# Altium PCB pcb.PcbDoc
Units mm, origin at the board's own origin, x right, y up, seen from the top; angles counter-clockwise.
Board outline 50 x 31 mm, 2 copper layers (Top Layer, Bottom Layer); 17 components, 25 nets, 104 pads, 41 vias.
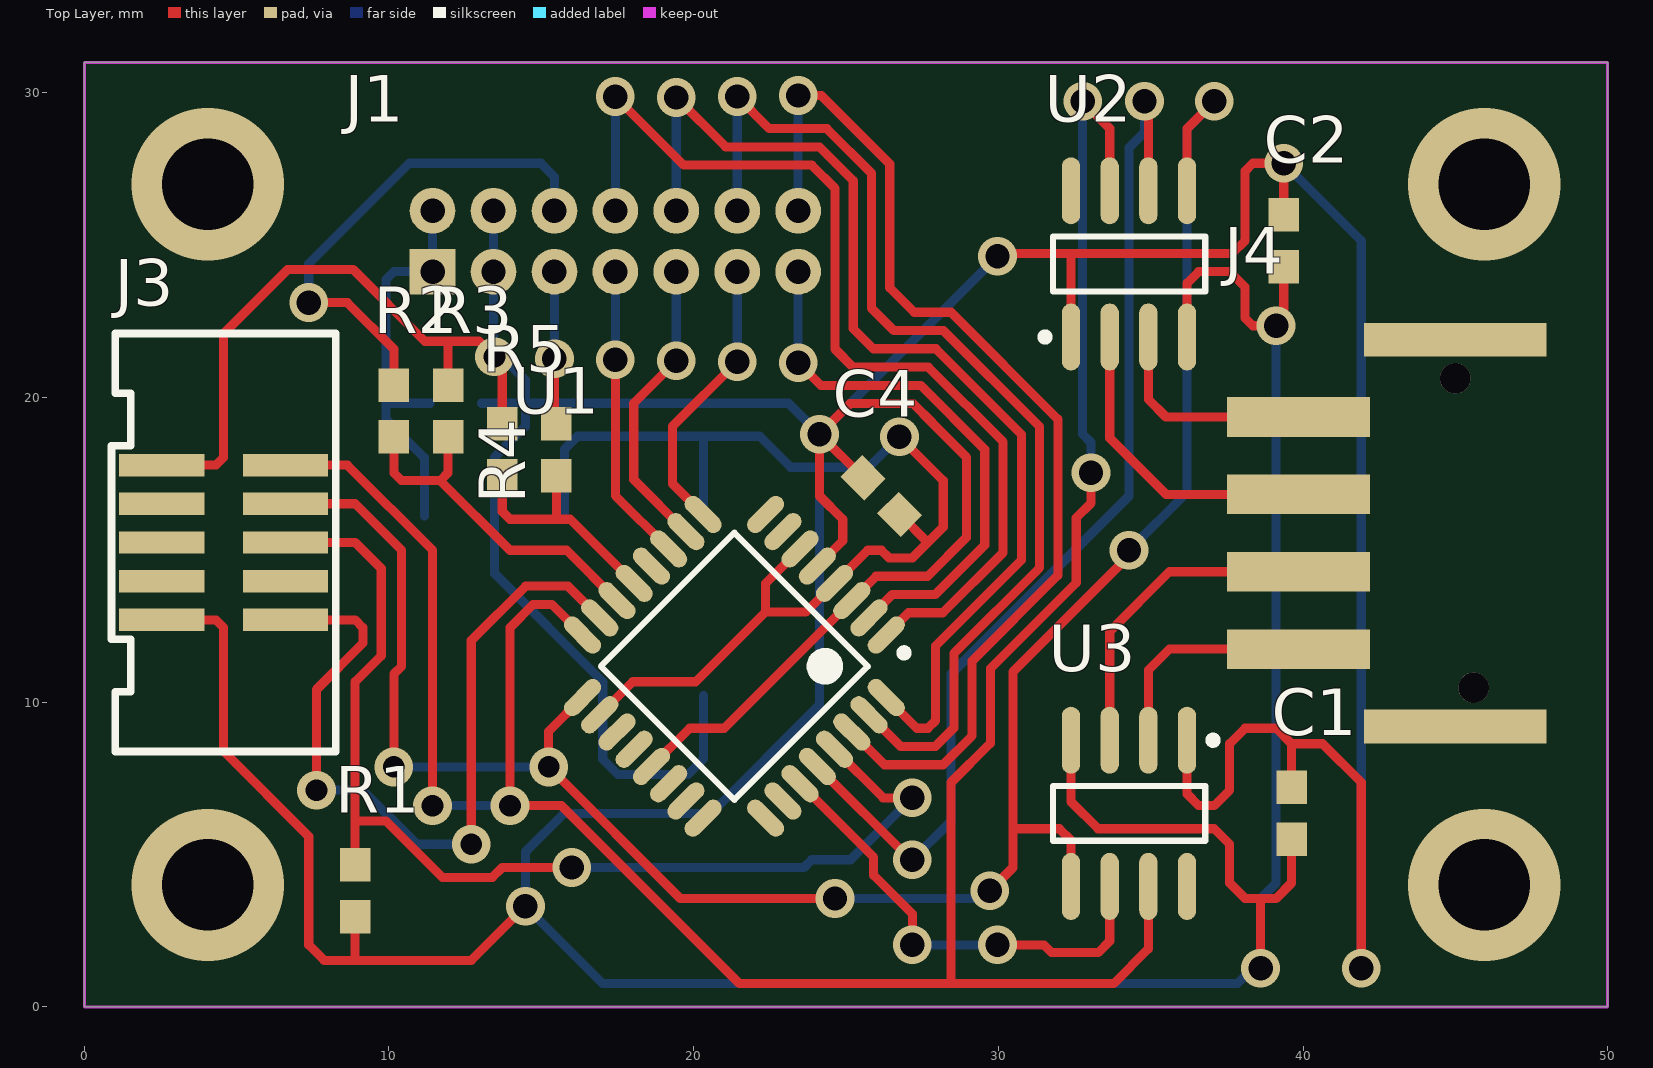
[diagram p0: Top Layer view]
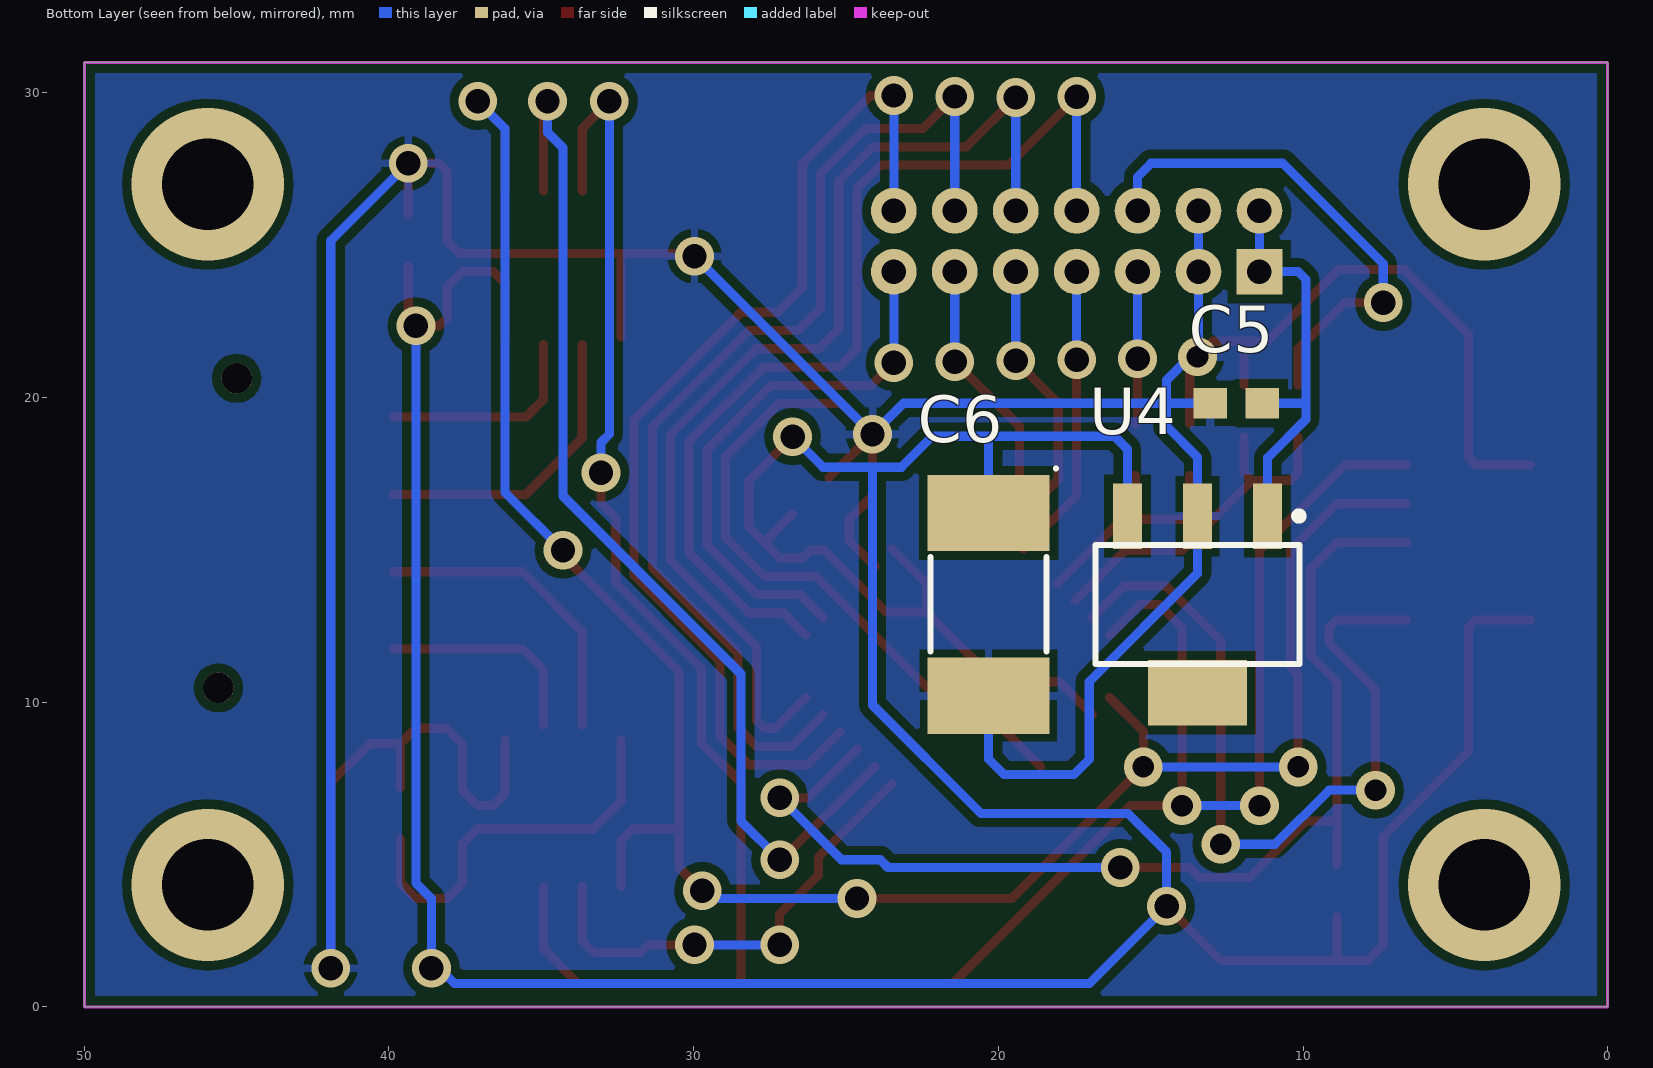
[diagram p1: Bottom Layer view, seen from below]
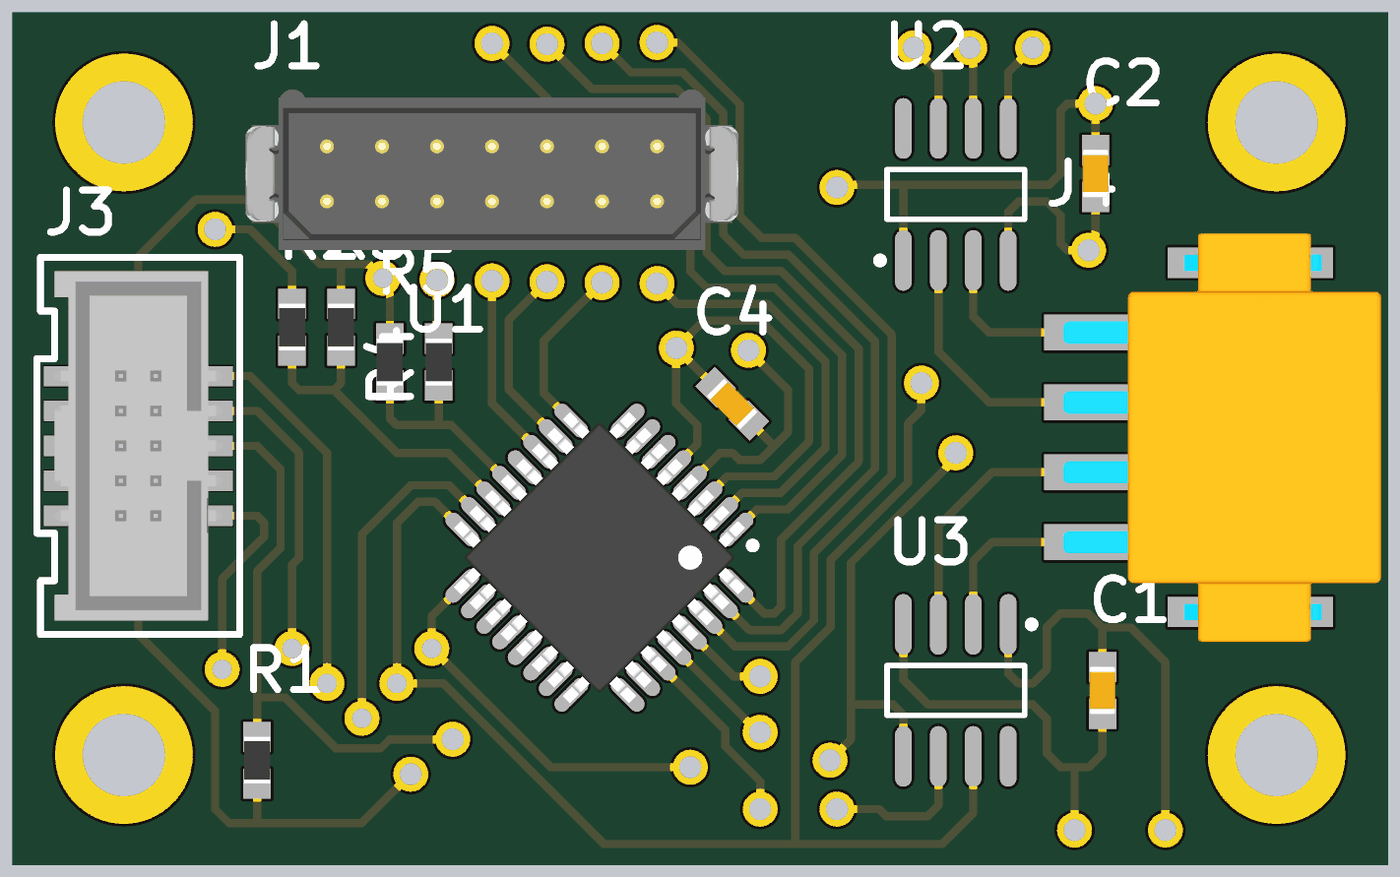
[diagram p2: 3D render of the assembled board from above, using the file's embedded part models]
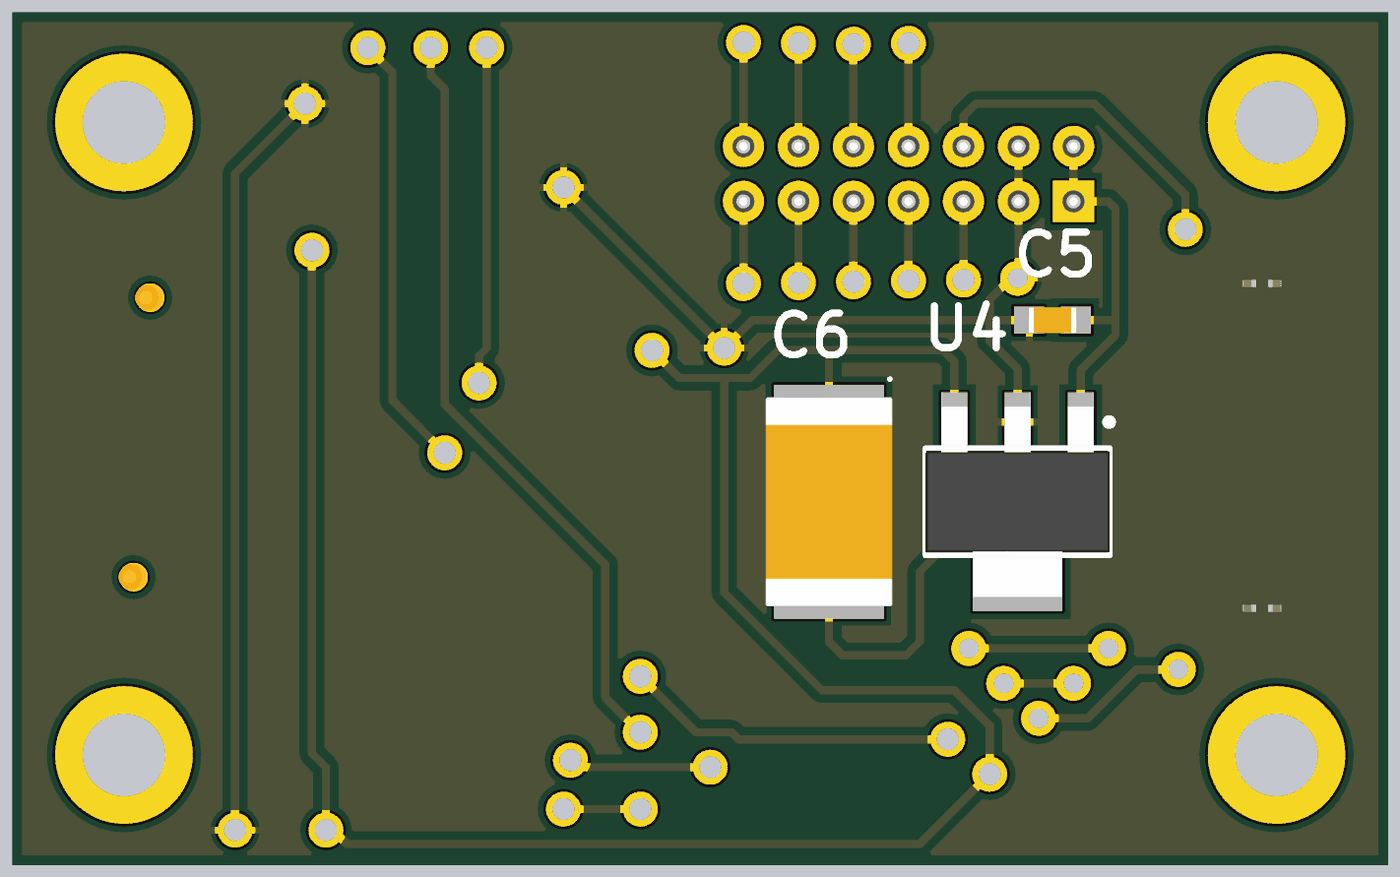
[diagram p3: 3D render of the assembled board from below, using the file's embedded part models]

## Layer stack, top to bottom
Top Solder: solder mask 0.0102, Solder Resist, Dk 3.5
Top Layer: signal copper 0.0356
Dielectric 1: dielectric 0.32, FR-4, Dk 4.8
Bottom Layer: signal copper 0.0356
Bottom Solder: solder mask 0.0102, Solder Resist, Dk 3.5

## Board outline
0,0 50,0 50,31 0,31

## Design rules (kind name [scope] priority, off if disabled: settings)
Clearance Clearance_MCU [InComponent('U1') vs InComponent('U1')] p1: gap=0.2
Clearance [All] p2: gap=0.3
HoleSize [All] p1: absolutevalues=TRUE maxlimit=3 minlimit=0.025 maxpercent=80.000 minpercent=20.000
MinimumSolderMaskSliver [All] p1 off: minsoldermaskwidth=0.254
PolygonConnect [All] p1: connectstyle=Relief reliefconductorwidth=0.254 reliefentries=4 polygonreliefangle="90 Angle" airgapwidth=0.254
RoutingVias [All] p1: holewidth=0.8 width=1.27 viastyle="Through Hole" minholewidth=0.8 minwidth=1.27 maxholewidth=0.8 maxwidth=1.27
SilkToSilkClearance [All] p1 off: silktosilkclearance=0.254
SilkToSolderMaskClearance [IsPad] p1 off: minsilkscreentomaskgap=0.254 clearancetoexposedcopper=TRUE
SolderMaskExpansion [All] p1: expansion=0.102
Width [All] p1: maxlimit=0.5 minlimit=0.3 preferedwidth=0.3
26 further rules are at their usual default settings.

## Classes and differential pairs
net class D[7..0]: D0 D1 D2 D3 D4 D5 D6 D7

## Components (designator, comment, footprint, x,y, rotation, side; value= is the part's Value field where it differs from the comment)
C1 "100n" cap_0603_standard 39.624,6.35 r270 top
C2 "100n" cap_0603_standard 39.37,25.146 r270 top
C4 "100n" cap_0603_standard 26.162,16.764 r315 top
C5 "0.47u" cap_0603_standard 12.192,19.812 r180 bottom
C6 "100u" cap_tantalum_eia_size_7343-31 20.32,13.208 r270 bottom
J1 "To radio ctrlr" con_datamate_2row_14pin 11.43,24.13 r0 top
J3 "ISP" SHF-105-01-X-D-SM 4.572,15.24 r90 top
J4 "Thermocouple terminal block" con_harting_spring_cage_4way 44.25,15.55 r270 top
R1 "10k" res_0603_standard 8.89,3.81 r90 top
R2 "10k" res_0603_standard 10.16,19.558 r270 top
R3 "10k" res_0603_standard 11.938,19.558 r90 top
R4 "10k" res_0603_standard 15.494,18.288 r270 top
R5 "10k" res_0603_standard 13.716,18.288 r90 top
U1 "ATmega328P" ic_atmel_atmega328p 21.336,11.176 r225 top
U2 "MAX31855 Thermocouple interface" SO8_N 34.29,24.384 r90 top
U3 "MAX31855 Thermocouple interface" SO8_N 34.29,6.35 r270 top
U4 "V_reg" ic_lin_reg_lm3940_sot223 13.462,13.208 r270 bottom

## Footprints (in the part's own frame and the unit in brackets; to place one, negate y for a bottom-side part, rotate by r counter-clockwise, add the part's x,y. Pads: shape width x height; smd on the part's side, far side on the other; paste and mask are expansions set on the pad)
cap_0603_standard [mm] "Generic 0603 chip capacitor (IPC-SM-782)"
  rect 1.1x1 smd: 1(-0.85,0) 2(0.85,0)
  body extent -0.87,-0.48 0.87,0.48, height 0.85
cap_tantalum_eia_size_7343-31 [mm] "Generic tantalum capacitor, EIA size code 7343-31"
  rect 2.5x4 smd: 1(-3,0) 2(3,0)
  silkscreen extent -4.51,-1.9 1.55,2.26, body extent -3.8,-2.3 3.8,2.3, height 3.1
con_datamate_2row_14pin [mm] "Datamate 14pin pcb-to-wire connector"
  rect 1.5x1.5 hole 0.8 mask+0.1: 1(0,0)
  round 1.5 hole 0.8 mask+0.1: 2(0,2) 3(2,0) 4(2,2) 5(4,0) 6(4,2) 7(6,0) 8(6,2) 9(8,0) 10(8,2) 11(10,0) 12(10,2) 13(12,0) 14(12,2)
  body extent -2.95,-1.77 14.95,4.08, height 8.05
con_harting_spring_cage_4way [mm] "Harting part no  14 01 041 3102 000"
  rect 1.1x6 smd: 0(-6.35,0.75) 0(6.35,0.75)
  round 1 hole 1: 0(-5.08,0.75) 0(5.08,1.35)
  rect 1.3x4.7 smd: 1(3.81,-4.4) 2(1.27,-4.4) 3(-1.27,-4.4) 4(-3.81,-4.4)
  body extent -7.43,-6.05 7.43,5.5, height 5
ic_atmel_atmega328p [mm] "TQFP, 32-Leads, Body 7,00x7,00mm, Pitch 0,80mm, IPC Medium Density"
  oval 1.5x0.55 smd: 1(-4.25,2.8) 2(-4.25,2) 3(-4.25,1.2) 4(-4.25,0.4) 5(-4.25,-0.4) 6(-4.25,-1.2) 7(-4.25,-2) 8(-4.25,-2.8) 17(4.25,-2.8) 18(4.25,-2) 19(4.25,-1.2) 20(4.25,-0.4) 21(4.25,0.4) 22(4.25,1.2) 23(4.25,2) 24(4.25,2.8)
  oval 0.55x1.5 smd: 9(-2.8,-4.25) 10(-2,-4.25) 11(-1.2,-4.25) 12(-0.4,-4.25) 13(0.4,-4.25) 14(1.2,-4.25) 15(2,-4.25) 16(2.8,-4.25) 25(2.8,4.25) 26(2,4.25) 27(1.2,4.25) 28(0.4,4.25) 29(-0.4,4.25) 30(-1.2,4.25) 31(-2,4.25) 32(-2.8,4.25)
  silkscreen extent -4.37,-3.1 3.1,3.75, body extent -4.5,-4.5 4.5,4.5, height 1.2
ic_lin_reg_lm3940_sot223 [mm] "LM3940 linear voltage regulator, SOT223"
  rect 2.15x0.95 smd: 1(-2.9,2.3) 2(-2.9,0) 3(-2.9,-2.3)
  rect 2.15x3.25 smd: 4(2.9,0)
  silkscreen extent -3.02,-3.35 1.95,3.45, body extent -3.46,-3.35 3.46,3.35, height 1.8
res_0603_standard [mm] "Generic 0603 chip resistor (IPC-SM-782)"
  rect 1.1x1 smd: 1(-0.85,0) 2(0.85,0)
  body extent -0.85,-0.48 0.85,0.48, height 0.6
SHF-105-01-X-D-SM [mil]
  rect 29x110 smd mask+2: 1(-100,-80) 2(-100,80) 3(-50,-80) 4(-50,80) 5(0,-80) 6(0,80) 7(50,-80) 8(50,80) 9(100,-80) 10(100,80)
  silkscreen extent -270,-145 270,145, body extent -250,-120 250,120, height 214
SO8_N [mm] "SOIC, 8-Leads, Body 4.9x3.9mm, Pitch 1.27mm, IPC Medium Density"
  oval 2.2x0.6 smd: 1(-2.4,1.905) 2(-2.4,0.635) 3(-2.4,-0.635) 4(-2.4,-1.905) 5(2.4,-1.905) 6(2.4,-0.635) 7(2.4,0.635) 8(2.4,1.905)
  silkscreen extent -2.52,-2.5 0.9,2.88, body extent -2,-2.5 2,2.5, height 1.75

## Part data
C1 C2 C4 C5: library part cap__genCapUnipol, "Generic unipolarised capasitor"
C6: library part cap_genCap_polar, "Generic polar capacitor"
J1: library part con_head_2x07pin, "Header 2x7pin"
J3: library part con_head_2x05pin, "Header 2x5pin"
J4: library part con_head_1x04pin, "Header 1x4pin"
R1 R2 R3 R4 R5: library part res__genResistor, "Generic resistor"
U1: library part ic_atmel_atmega328p, "Atmel 8 bit microcontroller"
U2 U3: library part ic_maxim_max31855_thermocouple_interface_simplified, "Maxim MAX31855 thermocouple interface"
U4: library part ic_lin_vreg_LM78xx, "Positive voltage regulator 78xx"

## Via types
v1: diameter 1.27, hole 0.8, Top Layer to Bottom Layer, 30 vias
v2: diameter 1.27, hole 0.711, Top Layer to Bottom Layer, 7 vias
v3: diameter 5, hole 3, Top Layer to Bottom Layer, 4 vias

## Nets (pads, with @x,y where several pads share a name; then routed paths per layer and width w, separated by ;. In a path a pad name is that pad's centre, name@x,y a point inside that pad or via, vN(x,y) a via of type N, cw(c..) or ccw(c..) an arc to the next point about the centre after c; other vN are vias at no path point)
D0: J1.7 U1.11 | length 9.8
  Top Layer w0.3: v1(17.43,21.24) 17.43,16.779 U1.11
  Bottom Layer w0.3: v1(17.43,21.24) J1.7
D1: J1.8 U1.1 | length 32.8
  Top Layer w0.3: v1(17.43,29.876) 19.681,27.625 23.876,27.625 24.638,26.863 24.638,21.59 25.23,20.998 27.7,20.998 30.156,18.541 30.156,14.91 28.178,12.932 27.052,12.932 U1.1
  Bottom Layer w0.3: J1.8 v1(17.43,29.876)
D2: J1.9 U1.10 | length 9.8
  Top Layer w0.3: v1(19.43,21.208) 18.034,19.812 18.034,17.306 U1.10
  Bottom Layer w0.3: v1(19.43,21.208) J1.9
D3: J1.10 U1.32 | length 35.2
  Top Layer w0.3: v1(19.43,29.846) 21.051,28.225 24.125,28.225 25.238,27.112 25.238,22.26 25.9,21.598 27.948,21.598 30.756,18.79 30.756,14.662 27.94,11.846 27.94,9.398 27.686,9.144 27.328,9.144 U1.32
  Bottom Layer w0.3: J1.10 v1(19.43,29.846)
D4: J1.11 U1.9 | length 9.3
  Top Layer w0.3: U1.9 19.304,17.168 19.304,19.05 v1(21.43,21.176)
  Bottom Layer w0.3: v1(21.43,21.176) J1.11
D5: J1.12 U1.31 | length 35.3
  Top Layer w0.3: v1(21.43,29.878) 22.483,28.825 24.373,28.825 25.838,27.36 25.838,22.93 26.57,22.198 28.197,22.198 31.356,19.039 31.356,14.413 28.54,11.597 28.54,9.149 27.935,8.544 26.796,8.544 U1.31
  Bottom Layer w0.3: J1.12 v1(21.43,29.878)
D6: J1.13 U1.2 | length 18.2
  Top Layer w0.3: v1(23.43,21.144) 24.176,20.398 27.451,20.398 29.556,18.293 29.556,15.159 27.929,13.532 26.52,13.532 U1.2
  Bottom Layer w0.3: v1(23.43,21.144) J1.13
D7: J1.14 U1.30 | length 35.4
  Top Layer w0.3: v1(23.43,29.91) 24.192,29.91 26.438,27.664 26.438,23.6 27.24,22.798 28.445,22.798 31.956,19.287 31.956,14.165 29.14,11.349 29.14,8.901 28.183,7.944 26.265,7.944 U1.30
  Bottom Layer w0.3: J1.14 v1(23.43,29.91)
FRAMESYNC1: J1.5 R4.1 | length 5
  Top Layer w0.3: v1(15.43,21.272) 15.43,19.202 R4.1
  Bottom Layer w0.3: v1(15.43,21.272) J1.5
FRAMESYNC2: J1.6 R2.1 | length 16.6
  Top Layer w0.3: v1(7.366,23.114) 8.636,23.114 10.16,21.59 R2.1
  Bottom Layer w0.3: v1(7.366,23.114) 7.366,24.384 10.668,27.686 14.986,27.686 15.43,27.242 J1.6
GND: C1.1 C2.1 C4.1 C5.1 C6.2 J1.3 J1.4 J3.10 R3.2 R5.2 U1.3 U1.5 U1.21 U2.1 U3.1 U4.2 | length 157.5
  Top Layer w0.3: J3.10 4.318,17.78 4.572,18.034 4.572,22.098 6.673,24.199 8.821,24.199 11.176,21.844 11.938,21.844 ; R3.2 11.938,21.844 ; R5.2 13.716,21.082 v2(13.462,21.336) 12.954,21.844 11.938,21.844 ; U1.21 19.87,9.144 21.001,9.144 25.989,14.132 27.681,14.132 28.956,15.407 28.956,18.034 27.838,19.152 27.838,19.162 27.203,19.798 25.132,19.798 v1(24.13,18.796) ; U1.5 24.892,15.298 24.892,16.002 24.13,16.764 v1(24.13,18.796) ; C4.1 v1(24.13,18.796) ; v1(29.972,24.638) 30.064,24.73 32.385,24.73 ; U2.1 32.385,24.73 ; U3.1 36.195,6.985 36.576,6.604 37.084,6.604 37.592,7.112 37.592,8.636 38.1,9.144 39.116,9.144 39.624,8.636 ; C2.1 v1@39.37,27.432 ; v1(39.37,27.686) 38.354,27.686 38.1,27.432 38.1,25.146 37.684,24.73 32.385,24.73 ; C1.1 39.624,8.636 ; v1(41.91,1.27) 41.91,7.366 40.64,8.636 39.624,8.636
  Bottom Layer w0.3: C5.1 14.478,19.812 ; J1.4 J1.3 13.43,21.368 v2(13.462,21.336) 13.716,21.336 14.478,20.574 14.478,19.812 ; C6.2 20.32,8.128 19.812,7.62 17.526,7.62 17.018,8.128 17.018,10.668 13.462,14.224 U4.2 13.462,18.034 14.478,19.05 14.478,19.812 ; v1(29.972,24.638) v1(24.13,18.796) 23.114,19.812 14.478,19.812 ; v1(39.37,27.686) 41.91,25.146 v1(41.91,1.27)
NetJ4_1: J4.1 U3.2 | length 7
  Top Layer w0.3: U3.2@34.925,9.258 34.925,11.049 35.616,11.74 J4.1
NetJ4_2: J4.2 U3.3 | length 10.1
  Top Layer w0.3: U3.3@33.655,9.258 33.655,12.319 35.616,14.28 J4.2
NetJ4_3: J4.3 U2.2 | length 10
  Top Layer w0.3: U2.2@33.655,21.73 33.655,18.669 35.504,16.82 J4.3
NetJ4_4: J4.4 U2.3 | length 7
  Top Layer w0.3: U2.3@34.925,21.73 34.925,19.939 35.504,19.36 J4.4
NetR2_2: R2.2 R3.1 U1.14 | length 11.8
  Top Layer w0.3: R2.2 10.16,17.526 10.414,17.272 11.684,17.272 ; R3.1 11.938,17.526 11.684,17.272 ; U1.14 15.829,14.986 13.97,14.986 11.684,17.272
NetR4_2: R4.2 R5.1 U1.13 | length 7.9
  Top Layer w0.3: R5.1 13.716,16.256 13.97,16.002 15.494,16.002 ; R4.2 15.494,16.002 ; U1.13 15.944,16.002 15.494,16.002
R\E\S\E\T\: J3.5 R1.2 U1.29 | length 36.9
  Top Layer w0.3: J3.5 8.89,15.24 9.744,14.386 9.744,11.522 8.89,10.668 8.89,6.096 ; R1.2 8.89,6.096 ; v1(16.002,4.572) 13.716,4.572 13.393,4.249 11.753,4.249 9.906,6.096 8.89,6.096 ; U1.29 26.22,6.858 v1(27.178,6.858)
  Bottom Layer w0.3: v1(16.002,4.572) 23.622,4.572 23.876,4.826 25.146,4.826 v1(27.178,6.858)
SPI_C\S\1\: U1.28 U2.6 | length 35.4
  Top Layer w0.3: U1.28 27.12,4.826 v1(27.178,4.826) ; v1(34.798,29.718) 34.925,29.591 U2.6
  Bottom Layer w0.3: v1(27.178,4.826) 28.448,6.096 28.448,10.922 34.29,16.764 34.29,28.194 34.798,28.702 v1(34.798,29.718)
SPI_C\S\2\: U1.27 U3.6 | length 15.3
  Top Layer w0.3: U1.27 25.908,4.907 25.908,4.318 27.178,3.048 v1(27.178,2.032) ; v1(29.972,2.032) 31.496,2.032 31.75,1.778 33.274,1.778 33.655,2.159 U3.6
  Bottom Layer w0.3: v1(27.178,2.032) v1(29.972,2.032)
SPI_MISO: J3.9 U1.16 U2.7 U3.7 | length 86.1
  Top Layer w0.3: J3.9 8.636,17.78 11.43,14.986 v2(11.43,6.604) ; U1.16 15.344,13.208 14.732,13.208 13.97,12.446 v2(13.97,6.604) 15.661,6.604 21.503,0.762 28.448,0.762 ; v1(32.766,29.718) 33.655,28.829 U2.7 ; v1(33.041,17.526) 33.041,16.531 32.556,16.046 32.556,13.916 29.74,11.1 29.74,8.652 28.448,7.36 28.448,0.762 ; U3.7 34.925,1.905 33.782,0.762 28.448,0.762
  Bottom Layer w0.3: v2(11.43,6.604) v2(13.97,6.604) ; v1(32.766,29.718) 32.766,18.796 33.041,18.521 v1(33.041,17.526) v1@33.02,17.547
SPI_MOSI: J3.1 U1.15 | length 26.4
  Top Layer w0.3: J3.1 8.89,12.7 9.144,12.446 9.144,11.938 7.62,10.414 v2(7.62,7.112) ; v2(12.7,5.334) 12.7,12.025 14.483,13.808 15.876,13.808 U1.15
  Bottom Layer w0.3: v2(7.62,7.112) 9.144,7.112 10.922,5.334 12.33,5.334 v2@12.515,5.519
SPI_SCK: J3.7 U1.17 U2.5 U3.5 | length 71.7
  Top Layer w0.3: J3.7 8.89,16.51 10.414,14.986 10.414,11.176 10.16,10.922 v2(10.16,7.874) ; U1.17 15.24,9.04 v2(15.24,7.874) 19.558,3.556 v1(24.638,3.556) ; v1(29.718,3.81) 30.48,4.572 30.48,5.842 ; U3.5 32.385,5.461 32.004,5.842 30.48,5.842 ; v1(34.29,14.986) 34.29,14.802 30.48,10.992 30.48,5.842 ; U2.5 36.195,28.829 v1(37.084,29.718)
  Bottom Layer w0.3: v2(10.16,7.874) v2(15.24,7.874) ; v1(24.638,3.556) 29.464,3.556 v1(29.718,3.81) ; v1(34.29,14.986) 36.195,16.891 36.195,28.829 v1(37.084,29.718)
VCC_3V3: C1.2 C2.2 C4.2 C6.1 J3.2 R1.1 U1.4 U1.6 U1.18 U2.4 U3.4 U4.3 | length 152.8
  Top Layer w0.3: J3.2 4.318,12.7 4.572,12.446 4.572,8.382 7.366,5.588 7.366,2.032 7.874,1.524 8.89,1.524 ; R1.1 8.89,1.524 ; v1(14.478,3.302) 12.7,1.524 8.89,1.524 ; U1.18 18,10.668 20.066,10.668 22.352,12.954 ; U1.6 22.352,13.889 22.352,12.954 ; v1(26.753,18.713) 28.194,17.272 28.194,15.748 27.686,15.24 ; C4.2 27.686,15.24 ; U3.4 32.385,6.731 33.274,5.842 37.084,5.842 37.592,5.334 37.592,4.064 38.1,3.556 38.608,3.556 ; U2.4 36.195,23.749 36.576,24.13 37.592,24.13 38.1,23.622 38.1,22.606 38.354,22.352 v1(39.116,22.352) 39.37,22.606 C2.2 ; v1(38.608,1.27) 38.608,3.556 ; C1.2 39.624,4.064 39.116,3.556 38.608,3.556 ; 22.352,12.954 23.68,12.954 25.712,14.986 26.162,14.986 26.416,14.732 27.178,14.732 27.686,15.24
  Bottom Layer w0.3: U4.3 15.762,18.302 16.187,18.727 20.32,18.727 ; C6.1 20.32,18.727 ; v1(26.753,18.713) 25.752,17.711 24.13,17.711 ; v1(39.116,22.352) 39.116,4.064 38.608,3.556 v1(38.608,1.27) 38.354,1.27 37.846,0.762 17.018,0.762 v1(14.478,3.302) 14.478,5.08 15.748,6.35 20.574,6.35 24.13,9.906 24.13,17.711 ; 20.32,18.727 22.167,18.727 23.183,17.711 24.13,17.711
VCC_5V0: C5.2 J1.1 J1.2 U4.1 | length 13.4
  Bottom Layer w0.3: U4.1 11.162,18.02 9.906,19.276 9.906,19.812 ; C5.2 9.906,19.812 ; J1.2 J1.1 10.16,24.13 9.906,23.876 9.906,19.812
pads on no net: J3.3 J3.4 J3.6 J3.8 J4.0 U1.7 U1.8 U1.12 U1.19 U1.20 U1.22 U1.23 U1.24 U1.25 U1.26 U2.8 U3.8 U4.4
copper on no net:
  other v3: 4.05,4 45.95,4 4.05,27 45.95,27

## Polygon pours and split planes (outlines as drawn)
GND on Bottom Layer "GND_L02_P000" (solid, remove dead copper, pour order 0): 0,31 0,0 50,0 50,31

## Keep-outs
Keep-Out Layer:
  the board outline again, w0.1

## Text inside footprints (layer, text, board x,y; h text height)
J3: Mechanical 1 "J1" at 5.08,14.743 h0.76 r90